# EAGLE board stm32uni (EAGLE 6.1)
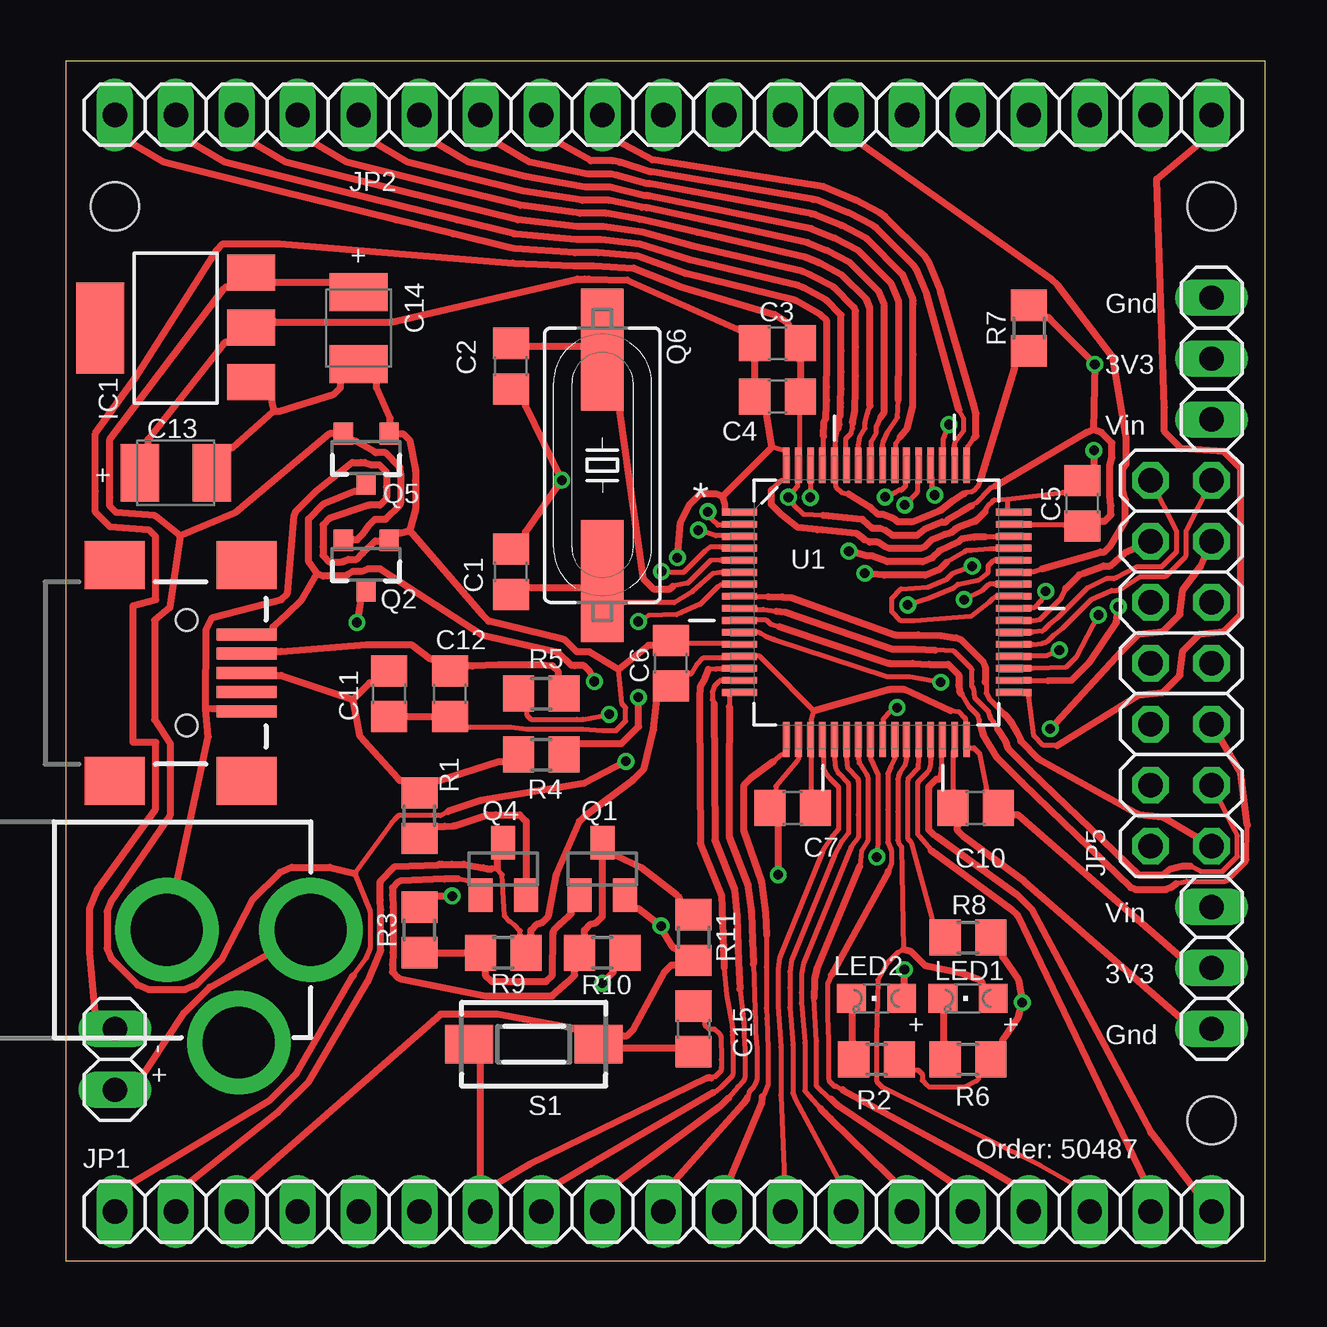
[diagram p0: board, top side]
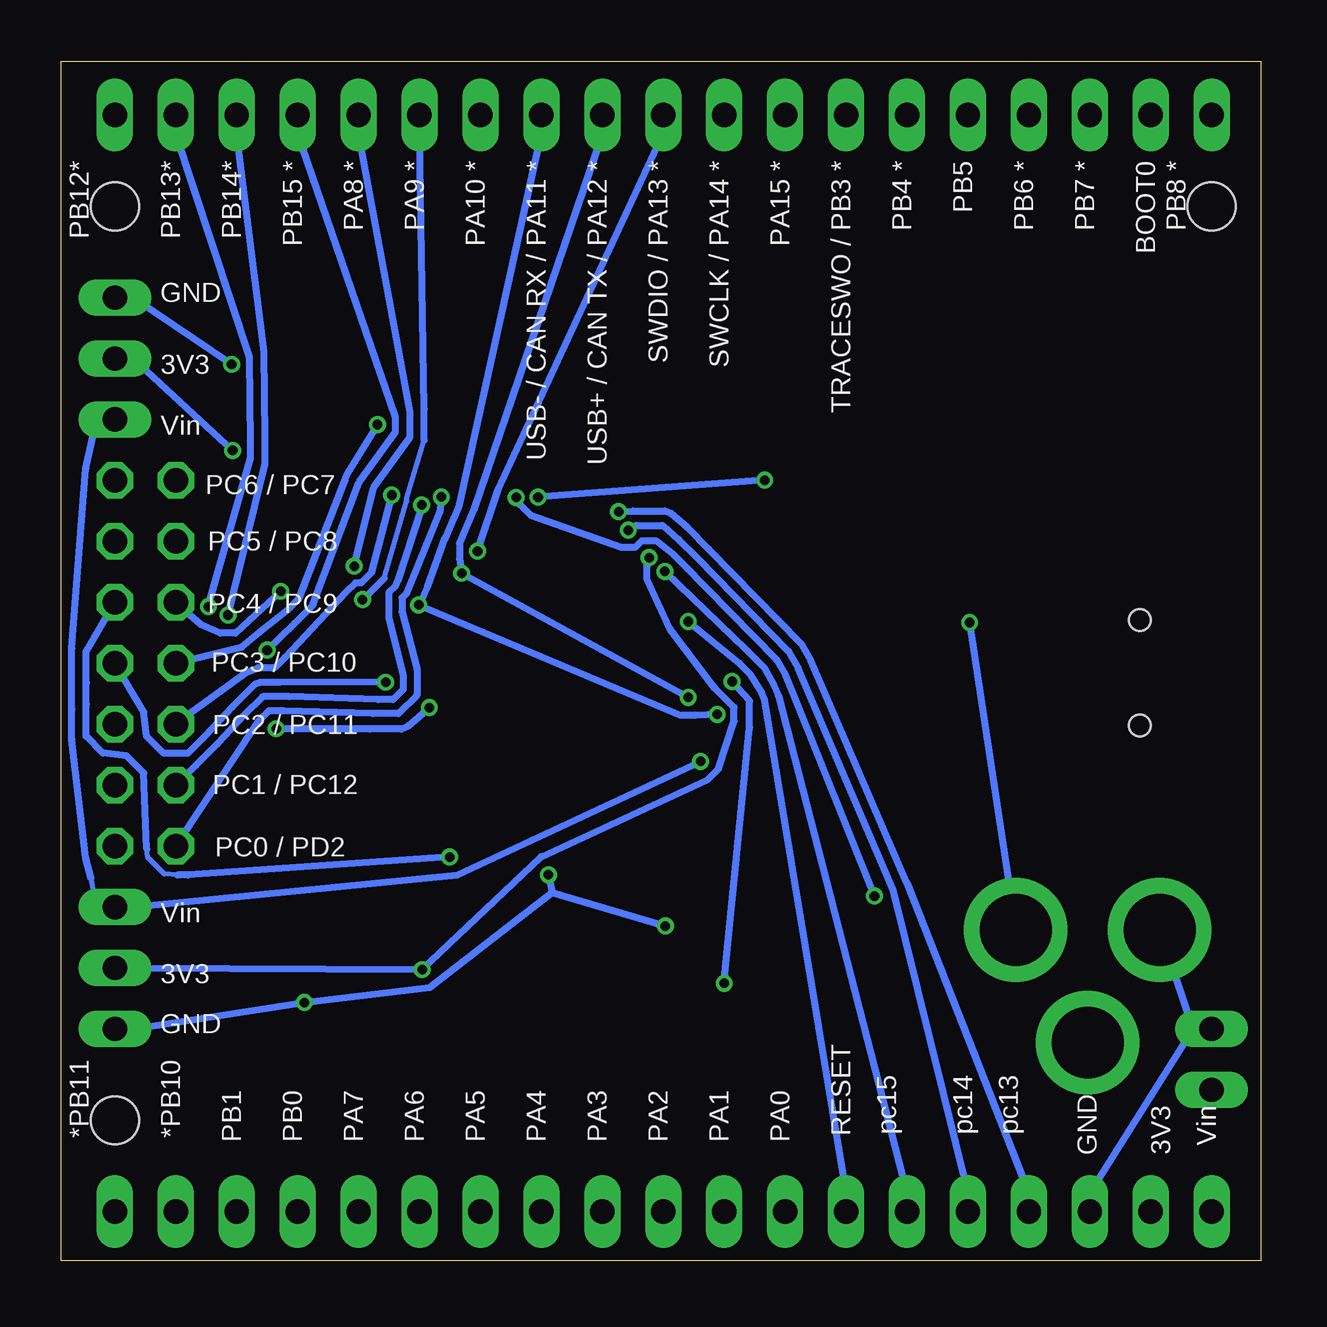
[diagram p1: board, bottom side, seen from below]

Size 50 x 50 mm. Coordinates in mm from the lower left corner, seen from the top.
Outline: 0,0 50,0 50,50 0,50 0,0
Copper layers (1*16): Top 0.035mm / dielectric 1.5mm / Bottom 0.035mm
Design rules: minimum track width 6mil, minimum drill 12mil, track to track 6mil, track to pad 6mil, pad to pad 6mil, via to via 6mil, smd to smd 0mil, copper to edge 10mil, drill to drill 10mil, minimum pad ring 10mil, minimum via ring 6mil, stop-mask expansion 2mil, vias tented up to drill 100mil, thermal gap 10mil
Holes 2 mm at 2.04,43.95 47.76,43.95 47.76,5.85

## Footprints (pad centres in the part's own frame; a part is rotated, then mirrored left to right if it is on the bottom)
C0805 = smd 1.3 x 1.5: 1 -0.95,0; 2 0.95,0
SMC_B = smd 1.6 x 2.4: + -1.5,0; - 1.5,0
SOT223 = smd 1.499 x 2.007: 1 -2.261,-3.15; 2 0.025,-3.15; 3 2.311,-3.15 | smd 3.81 x 2.007: 4 0,3.15
POWER_JACK_PTH = drill 2.997 pad 4.318: GND 0,7.7; GNDBREAK 4.7,10.7; PWR 0,13.7
1X19 = drill 1.016 long: 1 -22.86,0; 2 -20.32,0; 3 -17.78,0; 4 -15.24,0; 5 -12.7,0; 6 -10.16,0; 7 -7.62,0; 8 -5.08,0; 9 -2.54,0; 10 0,0; 11 2.54,0; 12 5.08,0; 13 7.62,0; 14 10.16,0; 15 12.7,0; 16 15.24,0; 17 17.78,0; 18 20.32,0; 19 22.86,0
1X03 = drill 1.016 long: 1 -2.54,0; 2 0,0; 3 2.54,0
2X07 = drill 1.016 octagon: 1 -7.62,-1.27; 2 -7.62,1.27; 3 -5.08,-1.27; 4 -5.08,1.27; 5 -2.54,-1.27; 6 -2.54,1.27; 7 0,-1.27; 8 0,1.27; 9 2.54,-1.27; 10 2.54,1.27; 11 5.08,-1.27; 12 5.08,1.27; 13 7.62,-1.27; 14 7.62,1.27
CHIPLED_0805 = smd 1.2 x 1.2: A 0,-1.05; C 0,1.05
1X02 = drill 1.016 long: 1 -1.27,0; 2 1.27,0
SOT23 = smd 1 x 1.4: 1 -0.95,-1.1; 2 0.95,-1.1; 3 0,1.1
SOT23-3 = smd 0.8 x 0.9: 1 -0.95,-1; 2 0.95,-1; 3 0,1.1
SM49 = smd 5.08 x 1.778: 1 -4.826,0; 2 4.826,0
R0805 = smd 1.3 x 1.5: 1 -0.95,0; 2 0.95,0
DTSM-3 = smd 2 x 1.6: 1 -2.7,0; 2 2.7,0
QFP50P1200X1200X160-64N = smd 1.473 x 0.279: 1 -5.715,3.759; 2 -5.715,3.251; 3 -5.715,2.743; 4 -5.715,2.261; 5 -5.715,1.753; 6 -5.715,1.245; 7 -5.715,0.762; 8 -5.715,0.254; 9 -5.715,-0.254; 10 -5.715,-0.762; 11 -5.715,-1.245; 12 -5.715,-1.753; 13 -5.715,-2.261; 14 -5.715,-2.743; 15 -5.715,-3.251; 16 -5.715,-3.759; 33 5.715,-3.759; 34 5.715,-3.251; 35 5.715,-2.743; 36 5.715,-2.261; 37 5.715,-1.753; 38 5.715,-1.245; 39 5.715,-0.762; 40 5.715,-0.254; 41 5.715,0.254; 42 5.715,0.762; 43 5.715,1.245; 44 5.715,1.753; 45 5.715,2.261; 46 5.715,2.743; 47 5.715,3.251; 48 5.715,3.759 | smd 0.279 x 1.473: 17 -3.759,-5.715; 18 -3.251,-5.715; 19 -2.743,-5.715; 20 -2.261,-5.715; 21 -1.753,-5.715; 22 -1.245,-5.715; 23 -0.762,-5.715; 24 -0.254,-5.715; 25 0.254,-5.715; 26 0.762,-5.715; 27 1.245,-5.715; 28 1.753,-5.715; 29 2.261,-5.715; 30 2.743,-5.715; 31 3.251,-5.715; 32 3.759,-5.715; 49 3.759,5.715; 50 3.251,5.715; 51 2.743,5.715; 52 2.261,5.715; 53 1.753,5.715; 54 1.245,5.715; 55 0.762,5.715; 56 0.254,5.715; 57 -0.254,5.715; 58 -0.762,5.715; 59 -1.245,5.715; 60 -1.753,5.715; 61 -2.261,5.715; 62 -2.743,5.715; 63 -3.251,5.715; 64 -3.759,5.715
USB-MINIB = smd 2.5 x 0.5: D+ 2.5,0; D- 2.5,0.8; GND 2.5,-1.6; ID 2.5,-0.8; VBUS 2.5,1.6 | smd 2.5 x 2: MTN1 -3,4.5; MTN2 2.5,4.5; MTN3 -3,-4.5; MTN4 2.5,-4.5 | hole 0.9: 0,2.2; 0,-2.2

## Placement (x,y rotation side)
C1  [C0805]  18.55,28.71 90 top
C2  [C0805]  18.55,37.28 270 top
C3  4.7  [C0805]  29.66,38.23 0 top
C4  0.1  [C0805]  29.66,36.01 0 top
C5  0.1  [C0805]  42.36,31.57 270 top
C6  0.1  [C0805]  25.22,24.9 90 top
C7  0.1  [C0805]  30.3,18.87 180 top
C10  0.1  [C0805]  37.92,18.87 180 top
C11  22nF  [C0805]  13.47,23.63 270 top
C12  22nF  [C0805]  16.01,23.63 270 top
C13  10  [SMC_B]  4.58,32.84 0 top
C14  10  [SMC_B]  12.2,38.87 270 top
C15  [C0805]  26.17,9.66 270 top
IC1  LM1117  [SOT223]  4.58,38.87 90 top
J1  POWER_JACKPTH  [POWER_JACK_PTH]  -3.49,13.79 270 top
JP1  [1X19]  24.9,2.04 0 top
JP2  [1X19]  24.9,47.76 0 top
JP3  [1X03]  47.76,12.2 270 top
JP4  [1X03]  47.76,37.6 90 top
JP5  [2X07]  46.49,24.9 90 top
LED1  [CHIPLED_0805]  37.6,10.93 90 top
LED2  [CHIPLED_0805]  33.79,10.93 90 top
POWER  [1X02]  2.04,8.39 90 top
Q1  [SOT23]  22.36,16.33 0 top
Q2  MOSFET-PCHANNELSMD  [SOT23-3]  12.52,29.03 180 top
Q4  [SOT23]  18.23,16.33 0 top
Q5  MOSFET-PCHANNELSMD  [SOT23-3]  12.52,33.47 180 top
Q6  [SM49]  22.36,33.16 270 top
R1  1.5k  [R0805]  14.74,18.55 270 top
R2  1k  [R0805]  33.79,8.39 180 top
R3  1k  [R0805]  14.74,13.79 270 top
R4  33  [R0805]  19.82,21.09 0 top
R5  33  [R0805]  19.82,23.63 180 top
R6  1k  [R0805]  37.6,8.39 180 top
R7  10k  [R0805]  40.14,38.87 270 top
R8  10k  [R0805]  37.6,13.47 180 top
R9  47k  [R0805]  18.23,12.84 0 top
R10  10k  [R0805]  22.36,12.84 0 top
R11  36k  [R0805]  26.17,13.47 90 top
S1  DTSM-3  [DTSM-3]  19.5,9.03 180 top
U1  STM32F103RET6  [QFP50P1200X1200X160-64N]  33.79,27.44 0 top
U$1  USB-MINIB-5PIN  [USB-MINIB]  5.04,24.5 0 top

## Library data of the parts
C1-C7 C10-C15 R1-R11 = rcl
IC1 = burr-brown; MPN: REG1117; OC_FARNELL: 1097566; OC_NEWARK: 14P6981
J1 Q1 Q2 Q4 Q5 U$1 = SparkFun
JP1-JP5 POWER = pinhead
LED1 LED2 = led
Q6 = crystal; OC_FARNELL: unknown; OC_NEWARK: unknown
S1 = switch-tact
U1 = stm32f103ret6; DESCRIPTION: ARM-based 32-bit MCU; MPN: STM32F103RET6; OC_FARNELL: 1624138; OC_NEWARK: 01P4101; PACKAGE: QFP-64; SUPPLIER: STMICROELECTRONICS

## Nets
+3V3: C3.1 C4.1 C5.1 C6.1 C7.1 C10.1 C13.+ IC1.2 JP1.2 JP3.2 JP4.2 LED2.A Q4.3 R9.2 U1.1 U1.13 U1.19 U1.32 U1.48 U1.64
+5V: C14.+ IC1.3 JP1.1 JP3.1 JP4.1 Q2.2 Q5.2
BOOT0: JP2.2 R7.2 U1.60
GND: C1.2 C2.2 C3.2 C4.2 C5.2 C6.2 C7.2 C10.2 C11.2 C12.2 C13.- C14.- C15.2 IC1.1 J1.GND JP1.3 JP3.3 JP4.3 POWER.2 Q1.2 Q2.1 Q5.1 R2.1 R6.1 R7.1 R8.1 R11.1 S1.1 U1.12 U1.18 U1.31 U1.47 U1.63 U$1.GND
N$1: LED2.C R2.2
N$2: J1.PWR POWER.1 Q2.3
N$4: Q1.1 R3.2 R9.1
N$5: Q1.3 Q4.1 R10.1 R11.2
N$6: C11.1 R1.1 R4.1 U$1.D+
N$7: C12.1 R5.1 U$1.D-
N$8: JP5.1 U1.8
N$9: Q4.2 R1.2
N$10: JP5.3 U1.9
N$11: JP5.5 U1.10
N$12: JP5.7 U1.11
N$13: JP5.9 U1.24
N$14: JP5.11 U1.25
N$15: JP5.13 U1.37
N$16: JP5.14 U1.38
N$17: JP5.12 U1.39
N$18: JP5.10 U1.40
N$19: JP5.8 U1.51
N$20: JP5.6 U1.52
N$21: JP5.4 U1.53
N$22: JP5.2 U1.54
N$42: LED1.C R6.2
OSC_IN: C2.1 Q6.1 U1.5
OSC_OUT: C1.1 Q6.2 U1.6
PA0: JP1.8 U1.14
PA1: JP1.9 U1.15
PA2: JP1.10 U1.16
PA3: JP1.11 U1.17
PA4: JP1.12 U1.20
PA5: JP1.13 U1.21
PA6: JP1.14 U1.22
PA7: JP1.15 U1.23
PA8: JP2.15 U1.41
PA9: JP2.14 U1.42
PA10: JP2.13 U1.43
PA11: JP2.12 R5.2 U1.44
PA12: JP2.11 R4.2 U1.45
PA13: JP2.10 U1.46
PA14: JP2.9 U1.49
PA15: JP2.8 U1.50
PB0: JP1.16 U1.26
PB1: JP1.17 LED1.A U1.27
PB2: R8.2 U1.28
PB3: JP2.7 U1.55
PB4: JP2.6 U1.56
PB5: JP2.5 U1.57
PB6: JP2.4 U1.58
PB7: JP2.3 U1.59
PB8: JP2.1 U1.61
PB9: R3.1 U1.62
PB10: JP1.18 U1.29
PB11: JP1.19 U1.30
PB12: JP2.19 U1.33
PB13: JP2.18 U1.34
PB14: JP2.17 U1.35
PB15: JP2.16 U1.36
PC13: JP1.4 U1.2
PC14: JP1.5 U1.3
PC15: JP1.6 U1.4
RESET: C15.1 JP1.7 S1.2 U1.7
VBUS: Q5.3 R10.2 U$1.VBUS

## Tracks (layer width: path | path; a pad name or v marks a point on that pad's centre or on a via)
+3V3  (via drill 0.4 pad 0.6)
  Top 0.2: 17.76,16.33 17.98,16.33 18.18,16.09 18.28,14.36 18.52,14.13 18.7,13.98 18.93,13.75 18.93,13.59 18.93,13.48 R9.2 | 38.31,31.21 38.4,31.39 38.44,31.48 38.63,31.67 38.71,31.71 39.24,31.74 | 39.24,31.74 39.24,31.34 39.24,31.24 U1.48 | 39.24,31.74 41.55,32.02 41.61,32.02 41.71,32.02 C5.1 | 29.44,33.92 29.85,33.79 29.89,33.79 29.99,33.79 U1.64 29.99,32.52 29.89,32.52 29.83,32.52 29.45,32.16 | 36.87,22.92 37.25,22.86 37.48,22.63 37.51,22.6 37.51,22.46 37.51,22.36 U1.32 37.59,21.38 37.69,21.38 37.85,21.38 38.08,21.15 38.37,19.68 38.37,19.62 38.37,19.52 C10.1 | C7.1 31.09,19.52 31.09,19.62 31.09,20.99 31.09,21.09 U1.19 31.09,22.36 31.09,22.46 31.09,22.59 31.09,22.63 31.18,22.92 29.21,24.9 28.98,25.14 28.89,25.22 28.81,25.22 28.71,25.22 U1.13 27.44,25.14 27.34,25.14 27.1,25.14 26.58,25.13 26.3,24.85 26.12,24.54 26.03,24.45 25.97,24.45 25.87,24.45 C6.1
  Top 0.279: U1.1 27.48,31.2 27.48,31.34 27.48,31.52 27.37,31.85
  Top 0.3: 36.87,22.92 34.96,23.8 34.34,23.8 31.18,22.92 | 38.31,31.21 37.99,30.89 37.91,30.82 37.19,30.55 37.07,30.5 36.93,30.36 36.81,30.31 36.63,30.27 36.09,30.05 35.81,29.77 35.6,29.68 34.34,29.68 34.13,29.77 33.85,29.95 33.83,29.95 33.51,29.95 33.28,30.05 32.95,30.31 31.32,30.47 30.51,30.56 29.82,31.11 29.41,31.52 29.41,32.12 29.45,32.16 | v42.85,33.77 42.85,33.17 42.85,33.02 C5.1 | v25.49,29.3 25.61,30.76 26.01,31.53 26.45,31.97 27.07,31.97 27.37,31.85 29.44,33.92 29.21,35.2 29.21,35.26 29.21,35.41 C4.1 28.71,36.61 28.71,36.76 28.71,37.48 28.71,37.63 C3.1 28.21,38.84 28.06,38.84 28,38.84 23.39,40.87 21.79,40.92 21.64,40.92 21.31,40.92 13.59,39.12 8.73,39.12 8.58,39.12 IC1.2 6.88,38.3 6.73,38.3 6.66,38.3 6.58,38.21 3.43,34.22 3.43,34.04 3.43,33.89 C13.+ | R9.2 19.38,13.44 19.38,13.59 19.38,13.77 19.65,14.04 19.86,14.1 20.11,14.35 20.46,16.11 21.41,18.31 21.67,18.58 23.65,20.06 24.09,20.5 24.5,22.13 24.62,23.24 24.62,23.3 24.62,23.45 C6.1 | Q4.3 17.98,16.88 17.98,16.73 17.98,16.33 | LED2.A 34.95,11.38 34.95,11.53 v34.95,12.13 | JP3.2 47,12.2 39.7,18.57 39.52,18.57 39.37,18.57 C10.1 | JP1.2 4.58,2.8 8.83,6.17 10.12,7.46 12.58,11.63 12.88,12.32 13.13,12.94 13.13,14.64 13.11,15.02 13.11,15.75 13.11,15.82 13.71,16.42 15.53,16.5 15.57,16.52 15.67,16.52 16.08,16.52 16.58,16.52 17.41,16.38 17.57,16.33 17.76,16.33
  Bottom 0.3: v25.49,29.3 25.58,29.04 25.58,28.42 24.61,26.33 22.73,23.85 21.95,23.06 21.95,22.48 22.59,20.5 23.03,20.06 30,16.83 v34.95,12.13 47,12.2 JP3.2 | JP4.2 47,37.6 v42.85,33.77
+5V  (via drill 0.4 pad 0.6)
  Top 0.2: 15.93,18.72 15.61,18.55 13.87,18.55 13.69,18.37 13.59,18.27 12.04,16.13 12.67,14.55 12.67,13.03 12.49,12.58 11.98,11.88
  Top 0.3: 4.77,30.22 4.34,27.21 3.7,26.7 3.7,22.55 4.35,21.55 4.34,18.57 1.9,15.01 1.72,14.55 1.72,13.02 1.9,12.57 2.99,11.48 3.44,11.3 4.97,11.3 5.43,11.48 6.51,12.57 7.8,15.07 8.92,16.19 9.42,16.4 11,16.4 12.04,16.13 | 4.77,30.22 3.72,31.05 2.09,31.19 1.83,31.45 1.83,31.82 1.83,34.22 6.58,40.49 6.66,40.58 6.73,40.58 6.88,40.58 IC1.3 8.58,40.78 8.73,40.78 11,40.78 11.15,40.78 C14.+ | v23.34,20.81 21.61,19.89 17.3,19.18 15.93,18.72 | 4.77,30.22 7.07,31.19 10.98,34.47 11.17,34.47 11.32,34.47 Q5.2 11.82,34.17 11.97,34.17 12.03,34.17 12.88,33.7 12.92,33.67 13.33,33.67 13.92,33.09 13.97,32.76 13.97,32.51 13.97,31.64 13.93,31.5 13.34,30.91 12.89,30.91 12.64,30.66 12.39,30.3 12.14,30.06 11.97,30.06 11.82,30.06 Q2.2 | JP1.1 2.04,2.8 8.49,6.68 9.61,7.8 11.98,11.88
  Bottom 0.2: JP3.1 48.52,14.74 48.75,15.94
  Bottom 0.3: 48.75,15.94 48.97,16.78 49.55,21.73 49.55,22.99 49.55,25.53 48.97,33.02 48.52,35.06 JP4.1 | JP3.1 47,14.74 33.49,16.07 v23.34,20.81
BOOT0
  Top 0.2: 38.14,32.65 38.06,32.36 38.02,32.28 37.83,32.09 37.74,32.05 37.58,32.02 37.52,32.02 37.44,31.97 | 32.19,34.7 32.08,34.23 32.08,34.14 32.08,33.89 32.08,33.79 U1.60 32.08,32.52 32.08,32.42 32.08,32.28 32.11,32.25 32.34,32.02 32.62,31.96
  Top 0.3: 32.19,34.7 32.23,34.86 32.23,35.14 32.27,35.22 32.3,35.59 32.3,35.76 32.31,36.33 32.31,37.05 32.31,37.92 32.31,39.42 31.7,40.03 30.7,40.58 30.56,40.63 25.96,41.73 23.92,42.38 22.3,42.56 21.27,42.56 18.75,42.79 18.67,42.8 16.29,43.39 11.45,44.59 9.03,45.19 6.62,45.79 4.58,47 JP2.2 | 37.44,31.97 37,31.69 36.52,31.31 36.48,31.27 36.43,31.27 35.26,30.8 34.68,30.8 34.5,30.92 34.06,31.1 33.85,31.1 33.54,31.39 32.62,31.96 | R7.2 39.54,37.42 39.54,37.27 39.54,37.21 38.14,32.65
GND  (via drill 0.4 pad 0.6)
  Top 0.2: 38.76,32.29 38.52,32.17 37.93,31.58 37.75,31.47 | 31.57,31.07 30.74,31.11 30.33,31.52 v30.12,31.82 30.33,32.1 30.5,32.28 30.5,32.42 30.5,32.52 U1.63 30.58,33.79 30.58,33.89 30.58,35.26 30.58,35.36 C4.2 | U1.18 30.54,21.09 30.54,20.99 30.54,20.93 30.5,20.85 29.6,19.78 29.6,19.62 29.6,19.52 C7.2 | U1.12 27.44,25.73 27.34,25.73 25.97,25.73 25.87,25.73 C6.2 | R2.1 35.29,7.95 35.39,7.95 35.52,7.95 35.7,7.77 35.7,7.51 35.87,7.33 35.98,7.24 37.13,7.24 37.47,7.24 37.96,7.49 38.05,7.58 38.05,7.64 38.05,7.74 R6.1 | C12.2 16.66,22.24 16.76,22.24 18.54,22.24 19.22,22.15 21.55,22.15 22.37,22.09 22.93,22.09 23.33,22.49 23.33,23.05 23.18,23.2 23.04,24.65 | C10.2 37,19.52 37,19.62 37,20.99 37,21.09 U1.31 | C5.2 41.71,30.65 41.61,30.65 40.24,30.65 40.14,30.65 U1.47
  Top 0.3: 8.67,35.41 8.92,35.41 11.19,36.12 11.45,36.38 11.45,36.57 11.45,36.72 C14.- 12.95,36.72 12.95,36.57 12.95,36.38 13.52,35.11 13.52,34.92 13.52,34.77 Q5.1 13.72,34.47 13.87,34.47 14.05,34.47 14.32,34.21 14.57,32.93 14.57,32.52 14.57,31.32 14.32,30.43 | 31.57,31.07 33.18,30.9 33.2,30.89 33.6,30.53 33.62,30.53 33.95,30.53 34.17,30.43 34.45,30.24 35.49,30.24 35.8,30.49 36.52,30.79 36.68,30.79 36.8,30.9 37.32,31.21 37.75,31.47 | 42.83,34.65 42.54,34.52 38.76,32.29 | 14.32,30.43 17.35,26.92 17.61,26.66 20.7,25.92 20.8,25.88 21.3,25.38 21.45,25.37 21.83,25.37 23.04,24.65 24.28,25.65 24.47,25.65 24.62,25.65 C6.2 | 5.83,23.01 5.84,26.29 6.1,26.8 8.35,27.4 8.97,27.55 9.24,27.81 9.52,31.08 9.58,31.22 10.43,32.07 11.93,33.27 12.3,33.27 12.45,33.27 12.71,33.17 13.06,33.17 13.27,32.97 13.37,32.86 13.37,32.26 13.37,31.89 13.35,31.74 13.1,31.49 12.65,31.49 10.98,30.93 10.72,30.66 10.72,29.76 10.72,29.39 10.98,29.13 11.13,29.13 11.5,29.13 11.77,29.23 12.11,29.23 12.38,29.48 12.89,30 13.07,30 13.22,30 Q2.1 13.72,30.33 13.87,30.33 13.93,30.33 14.32,30.43 | 42.83,34.65 v42.89,37.36 41.04,39.23 40.95,39.32 40.89,39.32 40.74,39.32 R7.1 | C1.2 19.15,30.16 19.15,30.31 19.15,30.37 v20.67,32.53 19.15,35.62 19.15,35.68 19.15,35.83 C2.2 | U$1.GND 6.44,23 6.29,23 6.1,23 5.83,23.01 | S1.1 21.35,9.68 21.2,9.68 21.14,9.68 17.99,10.28 15.99,10.28 15.62,10.28 7.12,2.8 JP1.3 | S1.1 23.05,9.38 23.2,9.38 23.39,9.38 23.65,9.64 24.97,12.06 25.23,12.32 25.42,12.32 25.57,12.32 R11.1 25.57,13.02 25.42,13.02 25.36,13.02 25.27,13.11 24.97,13.58 v24.81,13.95 23.87,14.68 23.81,14.68 23.66,14.68 Q1.2
  Top 0.3: S1.1 23.05,8.87 23.2,8.87 25.42,8.87 25.57,8.87 C15.2 | R8.1 39.05,12.87 39.05,12.72 39.05,12.66 39.7,11.72 v39.86,10.76 39.7,10.14 39.05,9.2 39.05,9.14 39.05,8.99 R6.1 | POWER.2 1.28,9.66 1,12.88 1,14.7 1.29,15.41 3.74,18.81 3.74,19.19 3.75,21.6 2.8,21.6 2.8,27.3 3.75,27.55 3.74,30.19 3.47,30.45 1.85,30.59 1.23,31.2 1.23,32.07 1.23,34.47 2.88,36.78 6.28,42.12 6.54,42.38 6.91,42.38 8.92,42.38 18.64,41.59 21.16,41.47 22.01,41.47 23.66,41.37 25.62,40.59 29.55,39.44 30.02,39.13 30.11,39.05 30.11,38.98 30.11,38.84 C3.2 30.61,37.63 30.61,37.48 30.61,36.76 30.61,36.61 C4.2 | JP3.3 47,9.66 39.94,15.81 37.43,17.67 37.17,17.93 37.17,18.12 37.17,18.27 C10.2 | J1.GND 5.94,21.84 5.83,23.01 | IC1.1 8.58,36.01 8.58,35.86 8.58,35.8 8.67,35.41 | C13.- 6.73,33.89 6.88,33.89 6.94,33.89 8.67,35.41 | C11.2 14.07,22.68 14.22,22.68 15.26,22.68 15.41,22.68 C12.2 | C7.2 29.69,18.27 29.69,18.12 v29.69,16.08 | C5.2 42.96,30.82 43.11,30.82 43.3,30.82 43.56,31.08 43.56,31.45 43.51,31.91 43.51,33.13 43.6,33.46 43.6,34.08 43.16,34.52 42.83,34.65
  Bottom 0.3: v29.69,16.08 29.54,15.34 | 29.54,15.34 v24.81,13.95 | 29.54,15.34 34.64,11.38 v39.86,10.76 47,9.66 JP3.3 | v20.67,32.53 v30.12,31.82 | 2.8,9.66 POWER.2 2.8,9.66 | 2.8,9.66 J1.GND | JP4.3 47,40.14 v42.89,37.36 | JP1.3 7.12,2.8 2.8,9.66
N$1
  Top 0.3: R2.2 32.79,8.99 32.79,9.14 32.79,10.33 32.79,10.48 LED2.C
N$2  (via drill 0.4 pad 0.6)
  Top 0.3: Q2.3 12.27,27.63 12.27,27.48 12.27,27.41 v12.13,26.6 | POWER.1 2.8,7.12 4.9,10.31 5.99,11.39 J1.PWR
  Bottom 0.3: v12.13,26.6 J1.PWR
N$4
  Top 0.3: Q1.1 21.06,14.68 21.06,14.53 21.06,14.46 20.97,14.38 20.58,14.01 20.33,13.76 20.31,13.62 20.28,11.9 20.02,11.63 19.65,11.63 17.75,11.63 17.48,11.9 17.48,12.09 17.48,12.23 R9.1 16.78,12.84 16.63,12.84 15.49,12.84 15.34,12.84 R3.2
N$5
  Top 0.2: Q4.1 16.88,15.83 16.78,15.83 16.74,15.83 16.33,15.92
  Top 0.3: 16.33,15.92 15.8,15.92 15.77,15.91 13.95,15.84 13.83,15.77 13.61,15.55 13.61,15.23 13.63,14.74 13.63,12.84 13.61,12.35 13.61,12.03 13.83,11.81 13.95,11.74 17.5,11.04 19.4,11.04 20.27,11.04 20.95,11.63 21.21,11.9 21.21,12.09 21.21,12.23 R10.1 21.62,13.44 21.62,13.59 21.62,13.77 21.88,14.03 22.1,14.08 22.36,14.34 22.36,16.73 22.36,16.88 Q1.3 22.71,16.88 22.86,16.88 22.92,16.88 24,16.38 25.48,15.22 25.57,15.13 25.57,15.07 25.57,14.92 R11.2
N$6
  Top 0.3: U$1.D+ 8.64,24.4 8.79,24.4 8.97,24.4 11.97,23.39 | R4.1 18.37,20.79 18.22,20.79 18.03,20.79 15.55,20 15.49,20 15.34,20 R1.1 14.14,20 13.99,20 13.93,20 13.84,20.09 12.27,21.84 11.97,23.39 | C11.1 12.87,24.08 12.72,24.08 12.66,24.08 12.57,23.99 11.97,23.39
N$7
  Top 0.3: U$1.D- 8.64,25.4 8.79,25.4 8.97,25.4 12.53,25.68 12.91,25.68 14.41,25.68 15.2,25.08 15.26,25.08 15.41,25.08 C12.1 16.61,24.78 16.76,24.78 16.95,24.78 18.03,24.83 18.41,24.83 19.71,24.83 20.29,24.79 20.53,24.55 20.53,24.38 20.53,24.23 R5.1
N$8
  Top 0.2: 38.32,24.1 38.36,24.06 38.37,23.66 38.48,23.42 38.82,23.08 39.11,22.78 | U1.8 28.71,27.68 28.81,27.68 29.27,27.68
  Top 0.3: 39.11,22.78 39.21,22.68 39.44,22.39 39.67,21.99 39.8,21.68 39.8,21.66 40.52,20.94 44.72,18.61 45.72,18.49 JP5.1 | 29.27,27.68 29.85,27.67 30.24,27.63 34.58,26.09 35.52,26.09 36.49,26.05 37.11,25.96 37.33,25.87 38.23,24.96 38.32,24.75 38.32,24.14 38.32,24.1
N$9
  Top 0.3: R1.2 15.34,18.1 15.49,18.1 15.8,18.1 16.18,18.12 17.55,18.58 17.92,18.58 18.92,18.58 19.18,18.31 19.18,15.93 19.18,15.78 Q4.2
N$10
  Top 0.2: 46.87,16.45 47.32,16.21 48.2,16.21 48.83,16.84 48.83,17.72 48.73,17.92 JP5.3 | 38.84,22.14 38.66,22.46 38.58,22.56 38.52,22.71 38.45,22.89 38.02,23.33 37.89,23.46 37.84,23.84 37.8,23.89 37.77,23.91 37.77,24.14 37.77,24.64 37.76,24.65 37.01,25.4 37,25.41 36.24,25.45 | U1.9 28.71,27.15 28.81,27.15 29.06,27.15 29.6,27.07
  Top 0.3: 29.6,27.07 29.99,27.03 34.45,25.49 35.41,25.49 36.24,25.45 | 38.84,22.14 39.17,21.66 39.21,21.56 39.21,21.54 39.3,21.33 40.19,20.43 44.72,16.07 45.72,16.07 46.03,16.32 46.54,16.45 46.87,16.45
N$11
  Top 0.2: 38.14,22.24 38.08,22.35 38.08,22.52 38.02,22.71 37.66,23.08 37.32,23.63 | 46.28,15.72 46.71,15.81 48.32,15.81 48.4,15.84 49.2,16.64 49.23,16.72 49.25,18.14 | U1.10 28.71,26.72 28.81,26.72 29.18,26.72 29.38,26.53 29.74,26.43
  Top 0.3: 29.74,26.43 34.33,24.89 35.29,24.89 35.99,24.86 36.78,24.86 37.22,24.42 37.22,23.98 37.25,23.75 37.28,23.67 37.32,23.63 | 38.14,22.24 38.24,21.89 38.79,21 39.86,19.93 44.38,15.55 44.59,15.47 45.85,15.47 46.05,15.55 46.28,15.72 | 49.25,18.14 48.97,20.32 JP5.5
N$12  (via drill 0.4 pad 0.6)
  Top 0.2: U1.11 28.71,26.2 28.81,26.2 28.87,26.2 28.95,26.16 29.17,26.03 29.52,25.89 34.23,24.34 35.18,24.34 v36.47,24.11
  Bottom 0.3: v36.47,24.11 40.87,24.11 41.69,24.11 41.94,24 42.87,23.08 44.01,21.86 44.72,21.15 45.72,21.15 46.43,21.86 46.55,22.86 JP5.7
N$13  (via drill 0.4 pad 0.6)
  Top 0.2: U1.24 33.54,21.09 33.54,20.99 33.54,20.93 33.85,20.24 33.85,18.78 33.85,17.46 v33.8,16.82
  Bottom 0.2: 45.14,16.07 45.7,16.12 46.38,16.8 46.43,17.16
  Bottom 0.3: 46.43,17.16 46.55,20.32 47.26,21.03 48.26,21.16 48.96,21.86 48.96,22.86 48.95,23.2 48.95,24.07 48.95,24.12 48.96,24.4 48.96,25.4 JP5.9 | v33.8,16.82 44.72,16.07 45.14,16.07
N$14  (via drill 0.4 pad 0.6)
  Top 0.2: U1.25 34.08,22.36 34.08,22.46 34.08,22.6 34.11,22.63 34.35,22.86 v34.65,23.05
  Top 0.3: v41.03,22.17 44.01,25.4 44.72,26.11 45.72,26.23 46.43,26.94 46.55,27.94 47.29,28.92 JP5.11
  Bottom 0.3: v34.65,23.05 35.56,22.27 35.81,22.16 37.13,22.16 v41.03,22.17
N$15
  Top 0.2: U1.37 40.14,25.69 40.24,25.69 40.3,25.69 40.69,25.73 40.79,25.75 40.84,25.77 40.92,25.83 41.16,26.06 41.55,26.36 42.77,27.57 43.58,27.94 43.79,27.94 44.07,28.06 44.78,28.51 45.78,28.51 45.86,28.54 46.66,29.34 46.69,29.42 46.69,30.42 JP5.13
N$16
  Top 0.2: JP5.14 46.29,30.42 46.29,29.54 45.66,28.91 44.66,28.91 44.58,28.88 43.8,28.47 43.69,28.42 43.38,28.42 42.57,28.04 41.31,26.77 40.98,26.5 40.77,26.29 40.69,26.23 40.3,26.2 40.24,26.2 40.14,26.2 U1.38
N$17
  Top 0.2: U1.39 40.14,26.68 40.24,26.68 40.3,26.68 40.59,26.72 41.12,27.24 41.5,27.62 41.68,28.02
  Top 0.3: 41.68,28.02 42.24,28.58 42.42,28.66 43.25,28.95 43.53,28.95 44.16,29.51 JP5.12
N$18  (via drill 0.4 pad 0.6)
  Top 0.2: U1.40 40.14,27.23 40.24,27.23 40.38,27.23 40.41,27.25 40.64,27.49 v40.84,27.9
  Bottom 0.3: v40.84,27.9 42.73,26.16 43.35,26.16 44.17,26.51 JP5.10
N$19  (via drill 0.4 pad 0.6)
  Top 0.2: U1.51 36.57,33.79 36.57,33.89 36.57,34.24 v36.81,34.85
  Bottom 0.3: v36.81,34.85 38.06,32.82 38.17,32.57 40.09,27.59 40.53,27.15 41.72,26.2 42.47,25.57 42.5,25.56 JP5.8
N$20  (via drill 0.4 pad 0.6)
  Top 0.2: U1.52 36.09,32.52 36.09,32.42 36.09,32.29 36.09,32.25 v36.22,31.91
  Bottom 0.3: v36.22,31.91 37.08,28.66 37.49,28.25 37.73,28.25 38.14,27.84 40.66,25.14 41.1,24.7 41.8,24.7 42.27,24.51 JP5.6
N$21  (via drill 0.4 pad 0.6)
  Top 0.2: U1.53 35.5,32.52 35.5,32.42 35.5,32.08 35.49,32.05 v34.97,31.5
  Bottom 0.3: v34.97,31.5 34.97,31.39 35.98,28.32 36.06,28.12 36.34,27.85 36.34,26.81 35.74,24.41 35.74,23.81 36.17,23.38 36.77,23.38 40.49,23.51 41.57,23.51 41.6,23.5 42.36,22.74 43.49,21.52 44.38,20.63 JP5.4
N$22  (via drill 0.4 pad 0.6)
  Top 0.2: U1.54 34.99,32.52 34.99,32.42 34.99,32.29 34.82,32.12 34.72,32.11 34.58,32.02 v34.15,31.83
  Bottom 0.3: v34.15,31.83 34.22,31.19 35.43,28.21 35.6,27.81 35.79,27.62 35.79,27.04 35.16,24.64 35.16,23.58 35.17,23.56 35.92,22.81 35.94,22.8 37,22.8 40.72,22.92 41.34,22.92 41.78,22.48 JP5.2
N$42
  Top 0.3: R6.2 36.6,8.99 36.6,9.14 36.6,10.33 36.6,10.48 LED1.C
OSC_IN
  Top 0.2: U1.5 27.44,29.19 27.34,29.19 27.28,29.19 26.87,29.18 25.93,28.24 25.3,28.11
  Top 0.3: 25.3,28.11 25.14,27.98 24.52,27.98 24.08,28.42 23.1,35.38 23.1,35.44 23.1,35.59 Q6.1 21.62,38.11 21.47,38.11 19.3,38.11 19.15,38.11 C2.1
OSC_OUT
  Top 0.2: U1.6 27.44,28.68 27.34,28.68 27.28,28.68 26.97,28.63 26.12,27.88 25.38,27.44 25.36,27.43 23.25,27.43 23.15,27.43 Q6.2
  Top 0.3: Q6.2 21.62,28.04 21.47,28.04 19.3,28.04 19.15,28.04 C1.1
PA0
  Top 0.2: 27.44,12.21 27.54,11.08 27.78,9.72 27.79,9.54 27.79,9.4 27.81,8.58 27.81,7.84 27.78,7.7 27.28,7.2 27.12,7.06 26.99,7.01 | U1.14 27.44,24.66 27.34,24.66 27.09,24.66 26.78,24.65
  Top 0.3: 26.78,24.65 26.65,24.33 26.65,24.32 26.43,23.92 26.42,23.47 26.42,22.97 26.45,17.4 27.32,15.24 27.37,14.11 27.41,12.94 27.44,12.21 | 26.99,7.01 21.86,4.01 19.82,2.8 JP1.8
PA1
  Top 0.2: 28.09,11.31 28.26,9.9 28.27,9.72 28.27,9.45 28.31,8.76 28.31,7.66 28.26,7.52 28.25,7.49 28.01,7.25 27.62,6.78 | U1.15 27.44,24.19 27.34,24.19 27.28,24.19 27.21,24.13 27.03,23.95 26.95,23.7 26.95,23.38 27.02,23.22
  Top 0.3: 27.02,23.22 27.05,17.52 27.88,15.47 27.88,15.45 27.97,14.36 28.01,13.07 28.04,12.46 28.09,11.31 | 27.62,6.78 27.35,6.51 27.24,6.41 22.36,2.8 JP1.9
PA2
  Top 0.2: 28.66,12.36 28.72,10.43 28.74,9.99 28.75,9.82 28.75,9.53 28.81,8.86 28.81,7.56 28.71,7.33 28.66,7.22 28.49,7.05 28.4,6.79 | U1.16 27.65,23.64 27.65,23.54 27.65,23.09
  Top 0.3: 28.4,6.79 28.22,6.53 24.9,2.8 JP1.10 | 27.65,23.09 27.65,20.05 27.65,18.55 27.65,17.68 28.43,15.64 28.43,15.56 28.57,14.52 28.61,13.32 28.66,12.36
PA3
  Top 0.2: 29.21,13.57 29.2,12.24 29.2,10.52 29.22,10.09 29.27,8.8 29.27,7.32 29.11,6.92 29.02,6.83 | U1.17 29.99,21.09 29.89,21.09 29.85,21.09 29.48,20.79
  Top 0.3: 29.48,20.79 28.51,20.07 28.25,19.8 28.25,18.3 28.25,17.93 28.99,15.78 29.17,14.49 29.21,13.57 | 29.02,6.83 29,6.54 27.44,2.8 JP1.11
PA4
  Top 0.2: U1.20 31.57,21.09 31.57,20.99 31.57,20.53 31.59,20.46 31.59,20.44 31.66,20.3 31.85,20.09 32.2,19.74 32.21,19.65 32.21,18.25 32.21,17.99 31.97,17.72 31.58,17.14 31.54,17.03 29.75,12.61 29.69,12.14 29.69,10.62 29.8,8.9 29.8,6.89 29.98,2.8 JP1.12
PA5
  Top 0.2: U1.21 32.04,21.09 32.04,20.99 32.04,20.93 32.08,20.54 32.2,20.32 32.61,19.91 32.62,19.82 32.62,18.42 32.62,17.82 32.34,17.48 32.04,16.89 30.25,12.51 30.18,12.04 30.18,11.38 30.18,10.54 30.3,9 30.3,6.99 30.4,6.76 32.52,2.8 JP1.13
PA6
  Top 0.2: U1.22 32.55,21.09 32.55,20.99 32.55,20.93 32.59,20.54 33.01,20.08 33.03,19.99 33.03,18.59 33.03,17.65 32.73,17.26 30.75,12.39 30.67,11.94 30.67,11.69 30.66,11.18 30.66,10.74 30.8,9.09 30.8,7.09 30.82,7.04 31.46,6.33
  Top 0.3: 31.46,6.33 31.64,6.15 31.87,5.92 35.06,2.8 JP1.14
PA7
  Top 0.2: 31.89,6.74 31.82,6.75 31.3,7.27 31.3,9.14 31.19,10.96 | U1.23 33.03,21.09 33.03,20.99 33.03,20.93 33.07,20.74 33.38,20.29 33.41,20.19 33.44,20.1 33.44,18.7 33.44,17.54 33.4,17.43 33.17,17.08 33.09,16.45
  Top 0.3: 31.89,6.74 32.12,6.52 37.6,2.8 JP1.15 | 33.09,16.45 31.3,12.16 31.21,11.77 31.21,11.58 31.19,10.96
PA8  (via drill 0.4 pad 0.6)
  Top 0.2: U1.41 38.87,27.65 38.77,27.65 38.73,27.65 38.62,27.58 38.47,27.43 37.73,26.85 35.37,26.66 34.81,26.66 34.42,27.05 34.42,27.61 34.81,28 35.92,28.07 36.72,28.4 36.98,28.66 v37.78,28.95
  Bottom 0.3: v37.78,28.95 36.97,32.22 35.47,34.28 35.46,34.31 35.46,35.39 37.6,47 JP2.15
PA9  (via drill 0.4 pad 0.6)
  Top 0.2: U1.42 38.87,28.2 38.77,28.2 38.71,28.2 38.5,28.2 38.42,28.16 38.2,27.93 v37.44,27.55
  Bottom 0.2: 36.53,28.43 35.59,31.65 35.59,31.76 34.86,34.19
  Bottom 0.3: v37.44,27.55 37.26,27.7 36.53,28.43 | 34.86,34.19 34.86,35.51 35.06,47 JP2.14
PA10
  Top 0.2: U1.43 40.14,28.72 40.24,28.72 40.38,28.72 40.7,28.84
  Top 0.3: 40.7,28.84 43.14,29.54 43.29,29.54 43.54,29.79 44.16,30.83 44.16,31.7 44.06,32.04 44.06,33 44.19,33.2 44.2,33.23 44.2,34.31 43.64,37.67 41.34,40.66 41.08,40.92 32.52,47 JP2.13
PA11  (via drill 0.4 pad 0.6)
  Top 0.2: U1.44 38.87,29.19 38.77,29.19 38.71,29.19 38.63,29.15 38.44,28.96 38.42,28.65 38.03,28.36 37.23,28.18 37.18,28.18 36.99,28.02 36.97,28.01 36.02,27.62 v35.09,27.33 | R5.2 19.21,22.98 19.21,22.88 19.21,22.75 19.39,22.57 21.29,22.57 21.55,22.57 v22.65,22.77
  Bottom 0.3: v22.65,22.77 23.55,22.73 24.17,22.73 v35.09,27.33 35.01,27.42 34.73,28.07 33.99,30.11 33.98,30.14 33.63,30.93 33.62,30.96 33.4,31.52 29.98,47 JP2.12
PA12  (via drill 0.4 pad 0.6)
  Top 0.2: 36.72,29.11 37.48,29.55 37.52,29.59 37.76,29.6 38.52,29.66 38.77,29.66 38.87,29.66 U1.45
  Top 0.3: 36.72,29.11 36.44,28.83 35.82,28.57 34.12,28.57 v33.3,28.65 | R4.2 21.27,21.55 21.42,21.55 23.16,21.55 23.87,22.26 23.87,23.28 v23.86,23.48
  Bottom 0.3: v23.86,23.48 v33.3,28.65 33.39,29.26 33.39,29.88 32.81,31.26 32.8,31.29 27.44,47 JP2.11
PA13  (via drill 0.4 pad 0.6)
  Top 0.2: U1.46 38.87,30.17 38.77,30.17 38.31,30.17
  Top 0.3: 38.31,30.17 37.85,30.16 37.32,30.07 37.2,29.96 36.4,29.58 36.12,29.3 35.71,29.13 34.23,29.13 33.6,29.38 33.39,29.38 v32.64,29.57
  Bottom 0.3: v32.64,29.57 31.78,32.12 24.9,47 JP2.10
PA14
  Top 0.2: U1.49 37.59,33.79 37.59,33.89 37.59,33.93 37.85,34.29
  Top 0.3: 37.85,34.29 37.94,34.38 37.94,35.32 37.83,35.72 36.46,40.44 35.96,41.63 35.8,41.87 34.15,43.52 33.91,43.68 32.89,44.22 31.59,44.76 31.19,44.84 24.44,45.89 22.36,47 JP2.9
PA15
  Top 0.2: U1.50 37.04,33.79 37.04,33.89 37.04,33.95 37.08,34.14 37.43,34.59 37.43,35.11 37.23,35.47
  Top 0.3: 37.23,35.47 35.88,40.26 35.43,41.35 35.34,41.49 33.77,43.06 33.62,43.15 32.61,43.68 31.41,44.18 31.13,44.23 24.39,45.38 24.31,45.39 23.09,45.78 22.8,45.84 21.88,45.84 19.82,47 JP2.8
PB0
  Top 0.2: 31.9,11.91 31.75,11.54 31.75,11.47 31.75,10.64 31.75,10.49 31.75,10.17 31.79,9.19 31.79,7.62 31.81,7.49 32.03,7.26 32.11,7.26 32.37,7.12 | U1.26 34.55,21.09 34.55,20.99 34.55,20.93 34.38,20.59 34.26,20.3 34.26,18.8 34.26,17.44 34.38,17.14 34.42,17.07 34.42,16.57 34.28,16.23
  Top 0.3: 32.37,7.12 38.1,4.01 40.14,2.8 JP1.16 | 34.28,16.23 31.9,11.91
PB1
  Top 0.2: JP1.17 42.68,2.8 40.62,3.96 34.02,7.24 33.79,7.47 33.79,7.52 33.79,7.76 33.79,9.31 33.84,11.7 34.25,12.42 34.66,12.83 34.92,12.98 34.83,17.25 34.73,17.38 34.67,17.52 34.67,18.72 34.67,20.07 34.71,20.21 34.76,20.34 34.98,20.66 35.03,20.93 35.03,20.99 35.03,21.09 U1.27
  Top 0.3: LED1.A 38.2,11.38 38.2,11.53 38.2,11.59 38.11,11.68 37.34,11.98 35.91,12.27 35.82,12.29 35.25,12.86 34.92,12.98
PB2
  Top 0.2: U1.28 35.54,21.09 35.54,20.99 35.54,20.93 35.52,20.53 35.11,20.12 35.09,19.98 35.09,18.63 35.09,17.61 35.22,17.45 35.25,17.38 36.1,14.26 36.1,14.22 36.1,14.12 R8.2
PB3
  Top 0.2: U1.55 34.59,33.79 34.59,33.89 34.59,34.02 34.59,34.06 34.78,34.34
  Top 0.3: 34.78,34.34 35.07,34.7 35.3,35.63 35.31,37.78 35.31,39.88 35.31,40.03 35.3,40.09 34.9,41.06 34.87,41.11 33.38,42.59 33.34,42.62 32.32,43.15 31.24,43.6 31.07,43.63 24.34,44.88 24.21,44.9 22.93,45.25 22.74,45.29 21.75,45.29 19.32,45.79 17.28,47 JP2.7
PB4
  Top 0.2: U1.56 34.04,33.79 34.04,33.89 34.04,33.95 34.08,34.14 34.26,34.56 34.67,35.14 34.7,35.88
  Top 0.3: 34.7,35.88 34.71,37.88 34.71,39.79 34.71,39.94 34.38,40.75 33.02,42.1 32.04,42.62 31.06,43.02 24.34,44.37 24.3,44.38 24.11,44.4 22.77,44.73 22.69,44.74 21.64,44.74 19.19,45.19 16.78,45.79 14.74,47 JP2.6
PB5
  Top 0.2: U1.57 33.58,33.79 33.58,33.89 33.58,34.14 33.78,34.5 33.78,34.75 33.97,35.16
  Top 0.3: 33.97,35.16 34.11,35.38 34.11,36.12 34.11,36.65 34.11,38.32 34.11,39.82 33.87,40.41 32.69,41.59 31.73,42.1 30.92,42.44 24.22,43.88 24.01,43.9 22.62,44.2 21.53,44.2 19.07,44.59 16.65,45.19 14.24,45.79 12.2,47 JP2.5
PB6
  Top 0.2: U1.58 33.03,33.79 33.03,33.89 33.03,33.95 33.1,34.34 33.31,34.69 33.31,34.9 33.42,35.31 33.43,35.38 33.52,35.62
  Top 0.3: 33.52,35.62 33.51,39.7 33.36,40.07 32.34,41.08 31.39,41.59 30.8,41.84 26.31,42.86 24.12,43.38 23.91,43.41 22.52,43.65 21.42,43.65 18.95,43.99 16.53,44.59 14.11,45.19 11.7,45.79 9.66,47 JP2.4
PB7
  Top 0.2: U1.59 32.51,33.79 32.51,33.89 32.51,34.17 32.51,34.26 32.73,34.48 32.79,34.69 32.79,34.91
  Top 0.3: 32.79,34.91 32.89,35.42 32.89,35.61 32.91,36.16 32.91,36.89 32.91,38.08 32.91,39.58 32.85,39.73 32.01,40.58 31.05,41.08 30.68,41.23 26.14,42.29 24.02,42.88 22.41,43.1 21.33,43.1 18.83,43.39 13.99,44.59 11.57,45.19 9.16,45.79 7.12,47 JP2.3
PB8
  Top 0.2: U1.61 31.57,33.79 31.57,33.89 31.57,34.03 31.58,34.35
  Top 0.3: 31.58,34.35 31.59,34.95 31.67,35.09 31.67,35.37 31.69,35.46 31.7,35.83 31.7,35.88 31.71,36.43 31.71,37.3 31.71,37.67 31.71,39.17 31.45,39.44 30.4,40.03 25.79,41.16 23.82,41.88 22.19,42.01 21.22,42.01 18.7,42.19 18.5,42.23 16.13,42.8 13.75,43.39 8.91,44.59 6.49,45.19 4.08,45.79 2.04,47 JP2.1
PB9  (via drill 0.4 pad 0.6)
  Top 0.2: U1.62 31.03,32.52 31.03,32.42 v31.03,31.81
  Top 0.3: R3.1 15.34,15.2 15.49,15.2 v16.1,15.2
  Bottom 0.3: v31.03,31.81 30.87,31.51 30.43,31.07 26.66,29.74 26.06,29.74 25.79,30.01 25.19,30.01 24.52,29.48 24.08,29.04 20.18,25.05 19.79,24.36 19.5,23.67 v16.1,15.2
PB10
  Top 0.2: U1.29 36.05,21.09 36.05,20.99 36.05,20.93 36.01,20.53 35.98,20.45 35.88,20.32 35.51,19.95 35.5,19.81 35.5,18.46 35.5,17.78 35.57,17.68 36.07,17.09
  Top 0.3: 36.07,17.09 39.39,14.67 39.65,14.41 45.22,2.8 JP1.18
PB11
  Top 0.2: U1.30 36.49,21.09 36.49,20.99 36.49,20.54 36.41,20.07
  Top 0.3: 36.41,20.07 36.3,20.06 36.28,20.06 36.17,19.97 35.97,19.76 35.96,19.62 35.96,18.27 35.96,17.97 36.17,17.76 36.31,17.68 39.63,15.27 40.25,14.65 45.22,5.34 JP1.19
PB12
  Top 0.2: 41.31,21.47 40.74,21.48 40.34,21.88 40.14,23.5 40.14,23.54 40.14,23.64 U1.33
  Top 0.3: 41.31,21.47 41.32,21.47 44.72,23.57 45.72,23.69 46.43,24.4 46.55,25.4 47.26,26.11 48.26,26.23 48.97,26.94 48.97,27.94 48.97,33.02 48.26,33.73 46.5,33.85 45.79,34.56 45.79,35.56 45.47,45.09 47.76,47 JP2.19
PB13  (via drill 0.4 pad 0.6)
  Top 0.2: U1.34 40.14,24.18 40.24,24.18 40.94,24.18
  Top 0.3: 40.94,24.18 41.93,24.2 42.66,24.93 43.79,26.6 v43.86,27.26
  Bottom 0.3: v43.86,27.26 42.1,33.46 42.1,34.08 42.14,37.67 45.22,47 JP2.18
PB14  (via drill 0.4 pad 0.6)
  Top 0.2: U1.35 40.14,24.7 40.24,24.7 40.3,24.7 41.7,24.75 42.11,25.16 v43.04,26.91
  Bottom 0.3: v43.04,26.91 41.5,33.23 41.5,34.31 41.54,37.9 42.68,47 JP2.17
PB15  (via drill 0.4 pad 0.6)
  Top 0.2: U1.36 40.14,25.22 40.24,25.22 40.88,25.22 41.09,25.3 v41.41,25.45
  Bottom 0.3: v41.41,25.45 40.27,26.56 39.5,27.33 39.49,27.36 37.57,32.45 37.56,32.48 36.06,34.54 36.06,35.16 40.14,47 JP2.16
PC13  (via drill 0.4 pad 0.6)
  Top 0.2: U1.2 27.44,30.66 27.34,30.66 27.17,30.66 26.94,30.89 v26.76,31.22
  Bottom 0.3: v26.76,31.22 26.15,31.25 24.83,31.25 24.58,31.14 23.92,30.57 22.98,29.64 19.17,25.73 18.75,24.99 14.76,15.77 14.75,15.74 9.66,2.8 JP1.4
PC14  (via drill 0.4 pad 0.6)
  Top 0.2: U1.3 27.44,30.22 27.34,30.22 27.09,30.22 v26.36,30.45
  Bottom 0.3: v26.36,30.45 26.06,30.64 26.03,30.65 24.95,30.65 24.92,30.64 24.26,30.07 23.49,29.3 19.68,25.39 19.28,24.7 15.35,15.51 12.2,2.8 JP1.5
PC15  (via drill 0.4 pad 0.6)
  Top 0.2: U1.4 27.44,29.74 27.34,29.74 26.84,29.74 26.64,29.58 25.75,28.68 25.23,28.68 v24.83,28.73
  Bottom 0.3: v24.83,28.73 21.46,25.48 20.69,24.71 20.3,24.02 20.1,23.55 14.74,2.8 JP1.6
RESET  (via drill 0.4 pad 0.6)
  Top 0.2: U1.7 27.44,28.16 27.34,28.16 27.3,28.16 27.19,28.1 26.46,27.37 25.66,27.01 25.46,26.93 24.3,26.9 v23.86,26.64 | C15.1 26.62,10.06 26.62,9.96 26.62,9.84 26.8,9.66 27.04,9.66 27.22,9.48 27.3,9.37 27.3,9.34 27.32,8.38 27.32,8.04 27.3,7.9 27.08,7.68 26.89,7.61
  Top 0.3: 26.89,7.61 26.74,7.61 19.32,4.01 17.28,2.8 | 17.28,2.8 JP1.7 17.28,2.8 | 17.28,2.8 17.28,8.22 17.28,8.38 S1.2
  Bottom 0.3: v23.86,26.64 21.72,24.89 21.28,24.45 20.8,23.68 20.7,23.43 17.28,2.8 JP1.7
VBUS  (via drill 0.4 pad 0.6)
  Top 0.3: 10.47,28.63 10.12,29.14 10.12,30.01 10.12,30.91 10.73,31.53 12.05,32.07 12.12,32.07 12.27,32.07 Q5.3 | v22.03,24.14 21.84,24.55 21.59,24.8 21.21,24.8 21.07,24.81 20.52,25.36 17.36,26.06 13.1,28.83 12.95,28.83 12.58,28.83 12.32,28.73 11.97,28.73 11.74,28.59 11.6,28.53 10.73,28.53 10.47,28.63 | U$1.VBUS 8.64,26.2 8.64,26.35 8.64,26.41 8.72,26.5 9.22,26.95 9.84,27.57 10.47,28.63 | R10.2 22.81,12.23 22.81,12.09 22.81,12.02 v22.36,11.56
  Bottom 0.3: v22.36,11.56 21.3,22.23 21.3,23.31 21.31,23.34 v22.03,24.14

## Text on the board
tPlace: + | Gnd | 3V3 | Vin | + | Vin | 3V3 | + | + | Gnd | - | + | Order: 50487
bPlace: PB8 * | BOOT0 | PB7 * | PB6 * | PB5 | PB4 * | TRACESWO / PB3 * | PA15 * | SWCLK / PA14 * | SWDIO / PA13 * | USB+ / CAN TX / PA12 * | USB- / CAN RX / PA11 * | PA10 * | PA9 * | PA8 * | PB15 * | PB14* | PB13* | PB12* | GND | 3V3 | Vin | PC6 / PC7 | PC5 / PC8 | PC4 / PC9 | PC3 / PC10 | PC2 / PC11 | PC1 / PC12 | PC0 / PD2 | Vin | 3V3 | GND | RESET | *PB10 | *PB11 | pc13 | pc14 | pc15 | PA0 | PA1 | PA2 | PA3 | PA4 | PA5 | PA6 | PA7 | PB0 | PB1 | Vin | 3V3 | GND